# EAGLE board C64_Prototyping_Cart_no_reset (EAGLE 9.5.2)
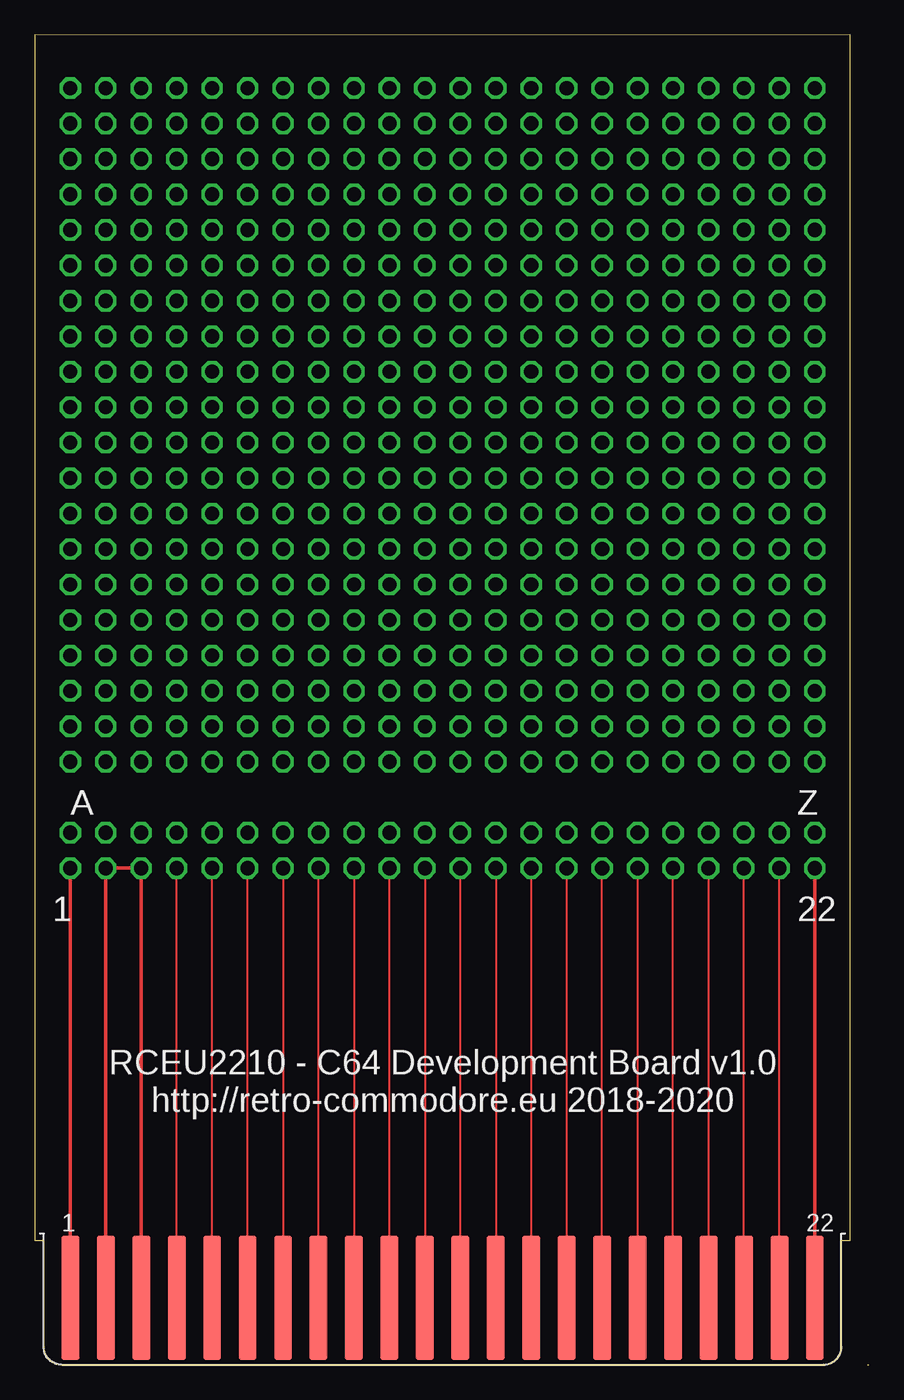
[diagram p0: board, top side]
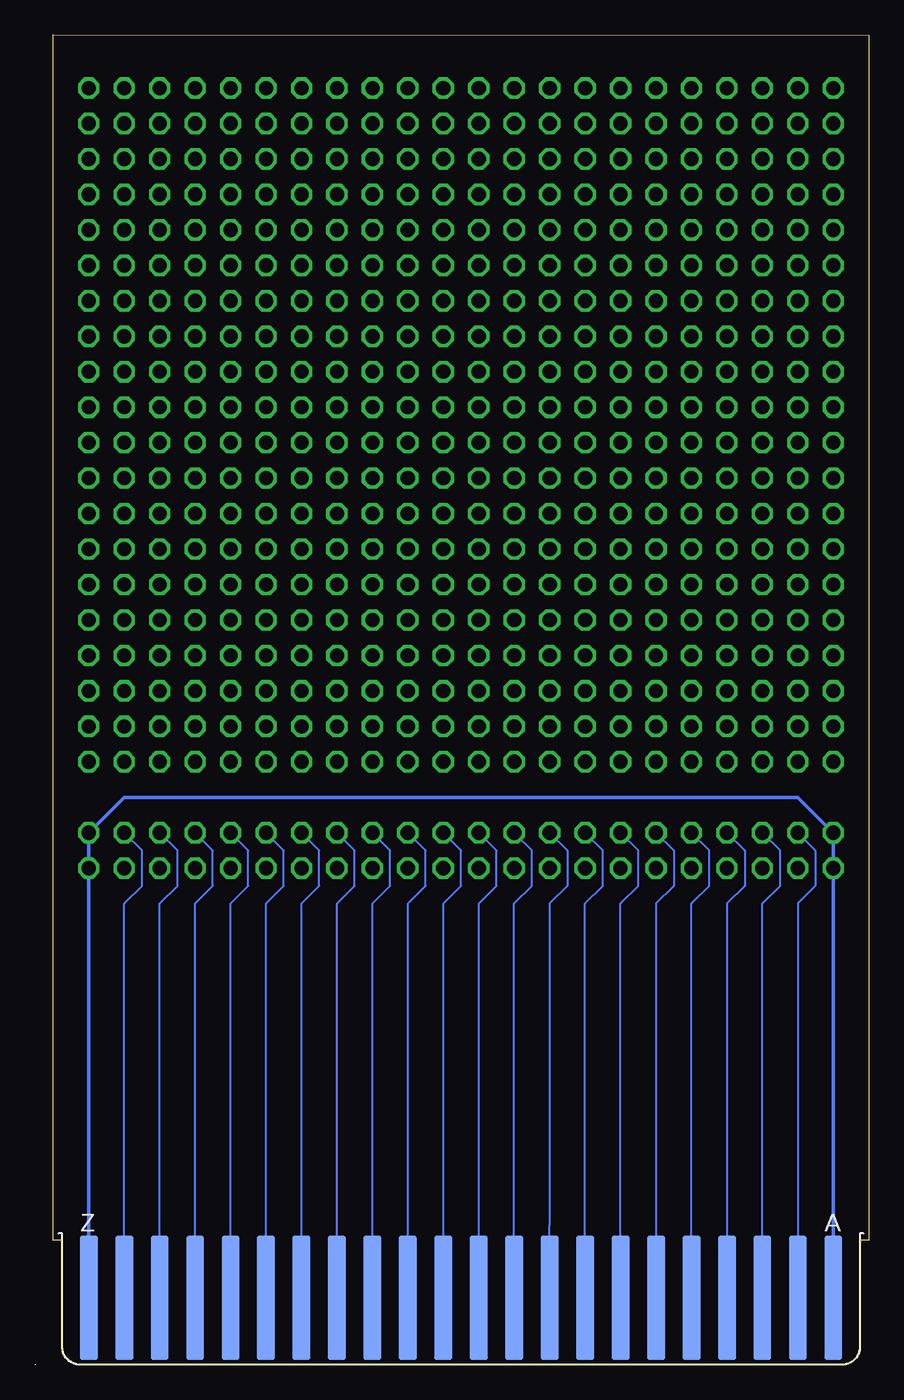
[diagram p1: board, bottom side, seen from below]

Size 59.74 x 95.25 mm. Coordinates in mm from the lower left corner, seen from the top.
Outline: 59.69,0 59.74,0
Outline: 0,95.24 0,8.89 0.64,8.89 0.64,1.27 arc90 1.91,0 56.52,0 arc90 57.78,1.27 57.78,8.89 58.42,8.89 58.42,95.25 0,95.24
Copper layers (1*16): Top 0.035mm / dielectric 1.5mm / Bottom 0.035mm
Design rules "default": minimum track width 6mil, minimum drill 0.35mm, track to track 6mil, track to pad 6mil, pad to pad 6mil, via to via 6mil, smd to smd 6mil, copper to edge 40mil, drill to drill 6mil, minimum pad ring 10mil, minimum via ring 8mil, stop-mask expansion 4mil, vias tented up to drill 0mil, thermal gap 10mil
Net classes: 0 default: clearance 0.205 mm

## Footprints (pad centres in the part's own frame; a part is rotated, then mirrored left to right if it is on the bottom)
0RB_COMMODORE_MA100-22-2 = smd 1.27 x 8.89: 1 -26.67,-0.305; 2 -24.13,-0.305; 3 -21.59,-0.305; 4 -19.05,-0.305; 5 -16.51,-0.305; 6 -13.97,-0.305; 7 -11.43,-0.305; 8 -8.89,-0.305; 9 -6.35,-0.305; 10 -3.81,-0.305; 11 -1.27,-0.305; 12 1.27,-0.305; 13 3.81,-0.305; 14 6.35,-0.305; 15 8.89,-0.305; 16 11.43,-0.305; 17 13.97,-0.305; 18 16.51,-0.305; 19 19.05,-0.305; 20 21.59,-0.305; 21 24.13,-0.305; 22 26.67,-0.305 | smd 1.27 x 8.89 bottom: A -26.67,-0.305; B -24.13,-0.305; C -21.59,-0.305; D -19.05,-0.305; E -16.51,-0.305; F -13.97,-0.305; H -11.43,-0.305; J -8.89,-0.305; K -6.35,-0.305; L -3.81,-0.305; M -1.27,-0.305; N 1.27,-0.305; P 3.81,-0.305; R 6.35,-0.305; S 8.89,-0.305; T 11.43,-0.305; U 13.97,-0.305; V 16.51,-0.305; W 19.05,-0.305; X 21.59,-0.305; Y 24.13,-0.305; Z 26.67,-0.305
2X22 = drill 1.016 octagon: 1 -25.4,-1.27; 2 -25.4,1.27; 3 -22.86,-1.27; 4 -22.86,1.27; 5 -20.32,-1.27; 6 -20.32,1.27; 7 -17.78,-1.27; 8 -17.78,1.27; 9 -15.24,-1.27; 10 -15.24,1.27; 11 -12.7,-1.27; 12 -12.7,1.27; 13 -10.16,-1.27; 14 -10.16,1.27; 15 -7.62,-1.27; 16 -7.62,1.27; 17 -5.08,-1.27; 18 -5.08,1.27; 19 -2.54,-1.27; 20 -2.54,1.27; 21 0,-1.27; 22 0,1.27; 23 2.54,-1.27; 24 2.54,1.27; 25 5.08,-1.27; 26 5.08,1.27; 27 7.62,-1.27; 28 7.62,1.27; 29 10.16,-1.27; 30 10.16,1.27; 31 12.7,-1.27; 32 12.7,1.27; 33 15.24,-1.27; 34 15.24,1.27; 35 17.78,-1.27; 36 17.78,1.27; 37 20.32,-1.27; 38 20.32,1.27; 39 22.86,-1.27; 40 22.86,1.27; 41 25.4,-1.27; 42 25.4,1.27; 43 27.94,-1.27; 44 27.94,1.27

## Placement (x,y rotation side)
IC1  0RB_COMMODORE_EXPANSION_PORT_C64  [0RB_COMMODORE_MA100-22-2]  29.21,5.08 0 top
JP1  [2X22]  27.94,36.83 0 top
JP2  [2X22]  27.94,44.45 0 top
JP3  [2X22]  27.94,49.53 0 top
JP4  [2X22]  27.94,54.61 0 top
JP5  [2X22]  27.94,59.69 0 top
JP6  [2X22]  27.94,64.77 0 top
JP7  [2X22]  27.94,90.17 0 top
JP9  [2X22]  27.94,80.01 0 top
JP10  [2X22]  27.94,74.93 0 top
JP11  [2X22]  27.94,69.85 0 top
JP12  [2X22]  27.94,85.09 0 top

## Library data of the parts
IC1 = C64CartridgeEdgeConnector
JP1-JP7 JP9-JP12 = pinhead

## Nets
!EXROM: IC1.9 JP1.17
!GAME: IC1.8 JP1.15
!IO1: IC1.7 JP1.13
!IO2: IC1.10 JP1.19
!IRQ: IC1.4 JP1.7
!NMI: IC1.D JP1.8
!RES: IC1.C JP1.6
!ROML: IC1.11 JP1.21
A0: IC1.Y JP1.42
A1: IC1.X JP1.40
A2: IC1.W JP1.38
A3: IC1.V JP1.36
A4: IC1.U JP1.34
A5: IC1.T JP1.32
A6: IC1.S JP1.30
A7: IC1.R JP1.28
A8: IC1.P JP1.26
A9: IC1.N JP1.24
A10: IC1.M JP1.22
A11: IC1.L JP1.20
A12: IC1.K JP1.18
A13: IC1.J JP1.16
A14: IC1.H JP1.14
A15: IC1.F JP1.12
BA: IC1.12 JP1.23
D0: IC1.21 JP1.41
D1: IC1.20 JP1.39
D2: IC1.19 JP1.37
D3: IC1.18 JP1.35
D4: IC1.17 JP1.33
D5: IC1.16 JP1.31
D6: IC1.15 JP1.29
D7: IC1.14 JP1.27
DMA: IC1.13 JP1.25
DOTCLK: IC1.6 JP1.11
GND: IC1.1 IC1.22 IC1.A IC1.Z JP1.1 JP1.2 JP1.43 JP1.44
N$1: IC1.B JP1.4
PHI2: IC1.E JP1.10
R!W: IC1.5 JP1.9
VCC: IC1.2 IC1.3 JP1.3 JP1.5

## Tracks (layer width: path | path; a pad name or v marks a point on that pad's centre or on a via)
!EXROM
  Top 0.152: JP1.17 IC1.9
!GAME
  Top 0.152: IC1.8 JP1.15
!IO1
  Top 0.152: JP1.13 IC1.7
!IO2
  Top 0.152: IC1.10 JP1.19
!IRQ
  Top 0.152: IC1.4 JP1.7
!NMI
  Bottom 0.152: JP1.8 8.89,36.83 8.89,34.29 10.16,33.02 IC1.D
!RES
  Bottom 0.152: IC1.C 7.62,33.02 6.35,34.29 6.35,36.83 JP1.6
!ROML
  Top 0.152: JP1.21 IC1.11
A0
  Bottom 0.152: JP1.42 52.07,36.83 52.07,34.29 53.34,33.02 IC1.Y
A1
  Bottom 0.152: JP1.40 49.53,36.83 49.53,34.29 50.8,33.02 IC1.X
A2
  Bottom 0.152: JP1.38 46.99,36.83 46.99,34.29 48.26,33.02 IC1.W
A3
  Bottom 0.152: JP1.36 44.45,36.83 44.45,34.29 45.72,33.02 IC1.V
A4
  Bottom 0.152: JP1.34 41.91,36.83 41.91,34.29 43.18,33.02 IC1.U
A5
  Bottom 0.152: JP1.32 39.37,36.83 39.37,34.29 40.64,33.02 IC1.T
A6
  Bottom 0.152: JP1.30 36.83,36.83 36.83,34.29 38.1,33.02 IC1.S
A7
  Bottom 0.152: JP1.28 34.29,36.83 34.29,34.29 35.56,33.02 IC1.R
A8
  Bottom 0.152: JP1.26 31.75,36.83 31.75,34.29 33.02,33.02 IC1.P
A9
  Bottom 0.152: JP1.24 29.21,36.83 29.21,34.29 30.48,33.02 IC1.N
A10
  Bottom 0.152: JP1.22 26.67,36.83 26.67,34.29 27.94,33.02 IC1.M
A11
  Bottom 0.152: JP1.20 24.13,36.83 24.13,34.29 25.4,33.02 IC1.L
A12
  Bottom 0.152: 22.86,7.8 IC1.K 22.86,9.98 22.86,11.43 22.86,33.02 21.59,34.29 21.59,36.83 JP1.18
A13
  Bottom 0.152: JP1.16 19.05,36.83 19.05,34.29 20.32,33.02 IC1.J
A14
  Bottom 0.152: IC1.H 17.78,33.02 16.51,34.29 16.51,36.83 JP1.14
A15
  Bottom 0.152: JP1.12 13.97,36.83 13.97,34.29 15.24,33.02 IC1.F
BA
  Top 0.152: IC1.12 JP1.23
D0
  Top 0.152: IC1.21 JP1.41
D1
  Top 0.152: IC1.20 JP1.39
D2
  Top 0.152: JP1.37 IC1.19
D3
  Top 0.152: IC1.18 JP1.35
D4
  Top 0.152: JP1.33 IC1.17
D5
  Top 0.152: IC1.16 JP1.31
D6
  Top 0.152: JP1.29 IC1.15
D7
  Top 0.152: IC1.14 JP1.27
DMA
  Top 0.152: JP1.25 IC1.13
DOTCLK
  Top 0.152: IC1.6 JP1.11
GND
  Top 0.254: IC1.A JP1.1 | IC1.Z JP1.43
  Bottom 0.254: IC1.A JP1.1 JP1.2 5.08,40.64 53.34,40.64 JP1.44 JP1.43 IC1.Z
N$1
  Bottom 0.152: IC1.B 5.08,33.02 3.81,34.29 3.81,36.83 JP1.4
PHI2
  Bottom 0.152: IC1.E 12.7,33.02 11.43,34.29 11.43,36.83 JP1.10
R!W
  Top 0.152: IC1.5 JP1.9
VCC
  Top 0.254: IC1.3 JP1.5 JP1.3 IC1.2

## Text on the board
tPlace: A | Z | 1 | 22
tNames: RCEU2210 - C64 Development Board v1.0 / http://retro-commodore.eu 2018-2020